# Altium PCB DustCollectorSwitch_V2.PcbDoc
Units mil, origin at the board's own origin, x right, y up, seen from the top; angles counter-clockwise.
Board outline 2100 x 2705.2 mil, 2 copper layers (Top Layer, Bottom Layer); 49 components, 28 nets, 158 pads, 26 vias.
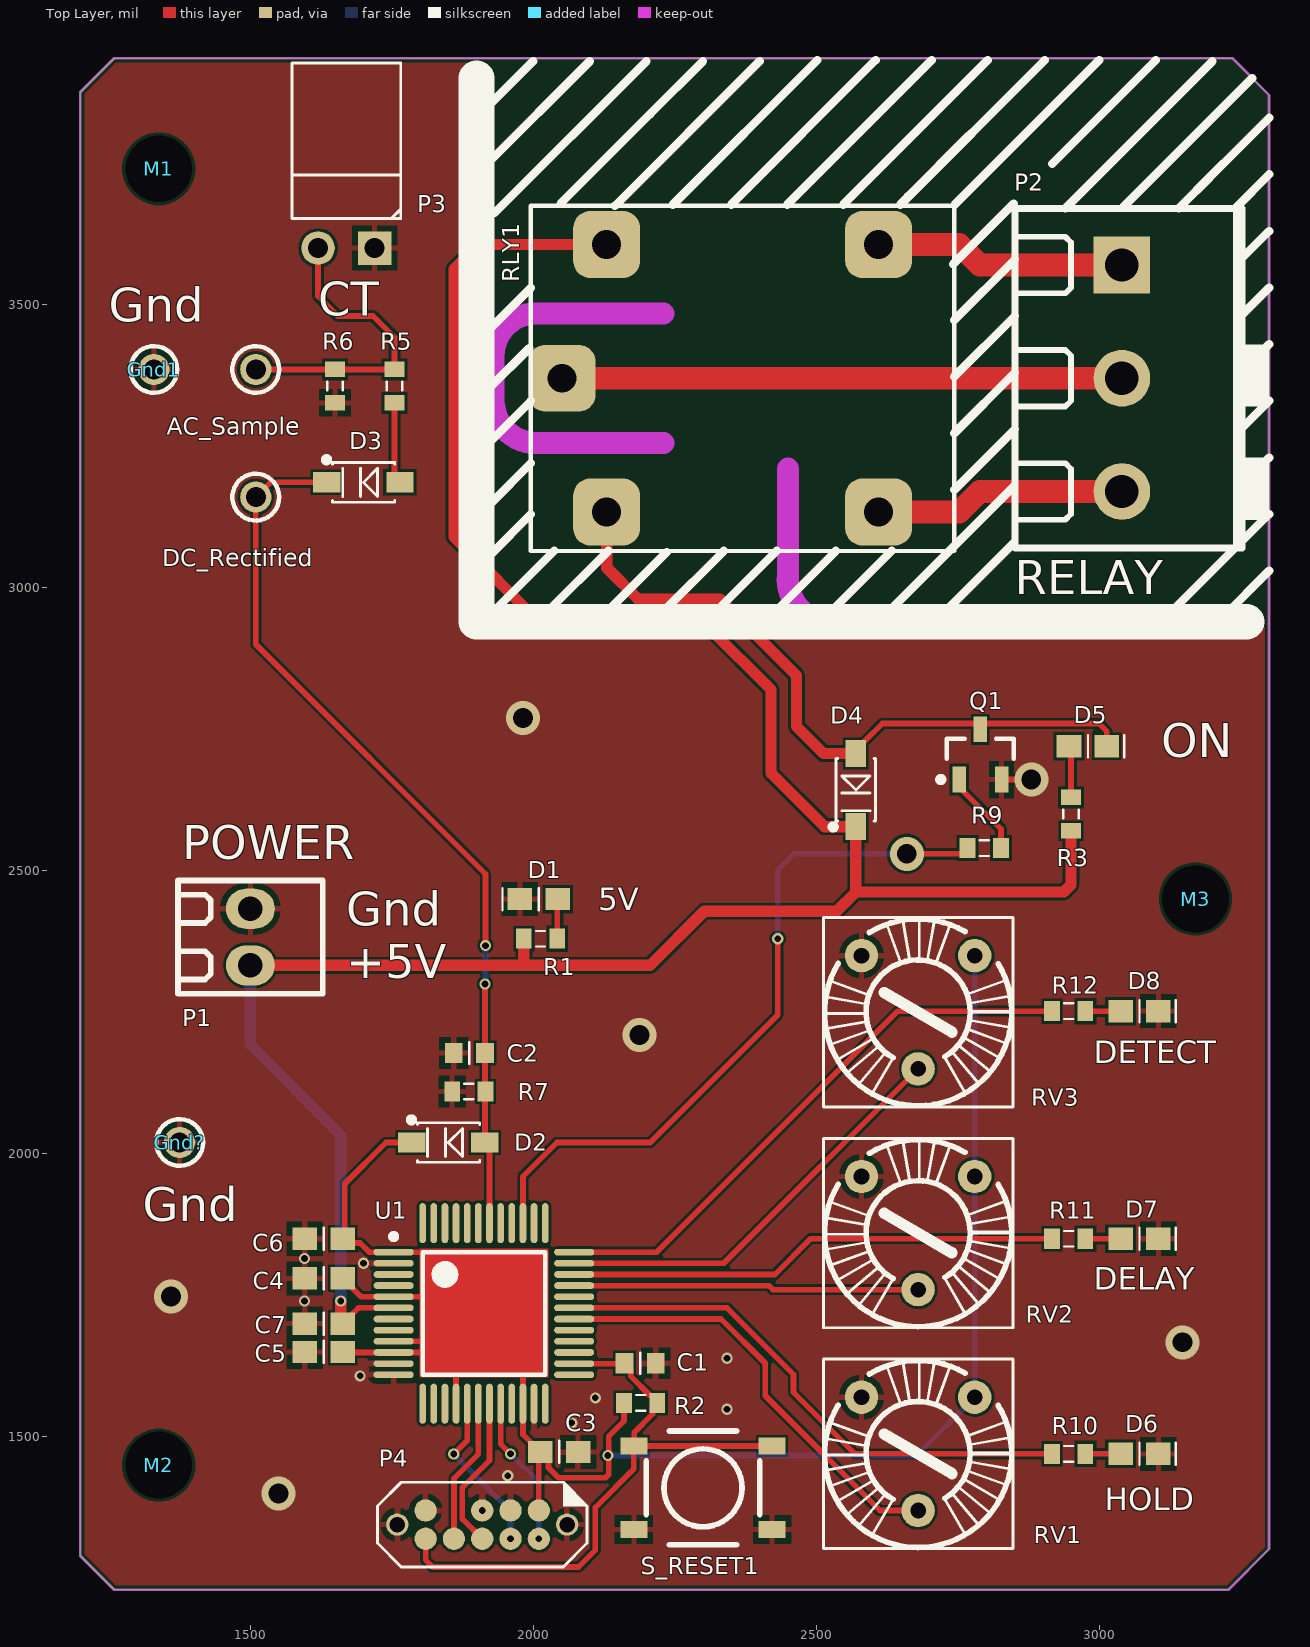
[diagram p0: Top Layer view]
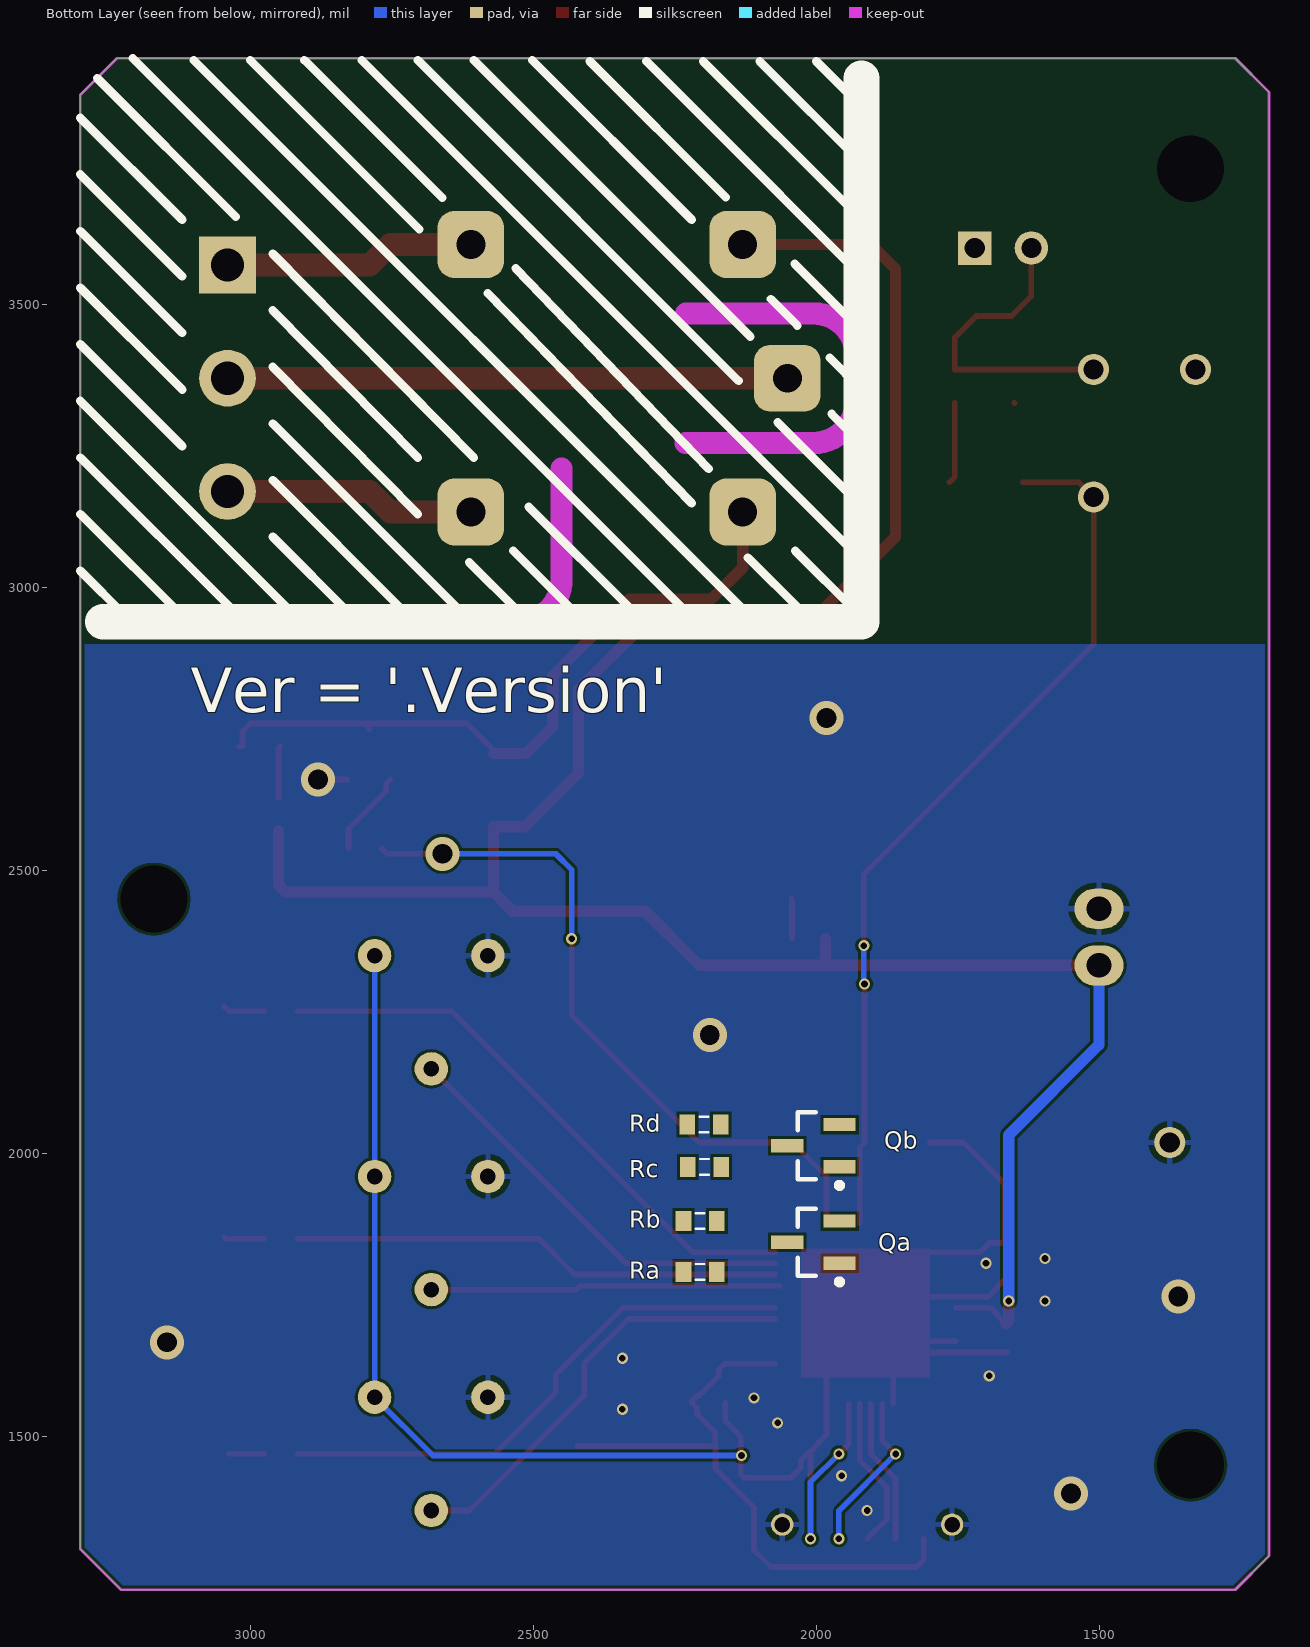
[diagram p1: Bottom Layer view, seen from below]
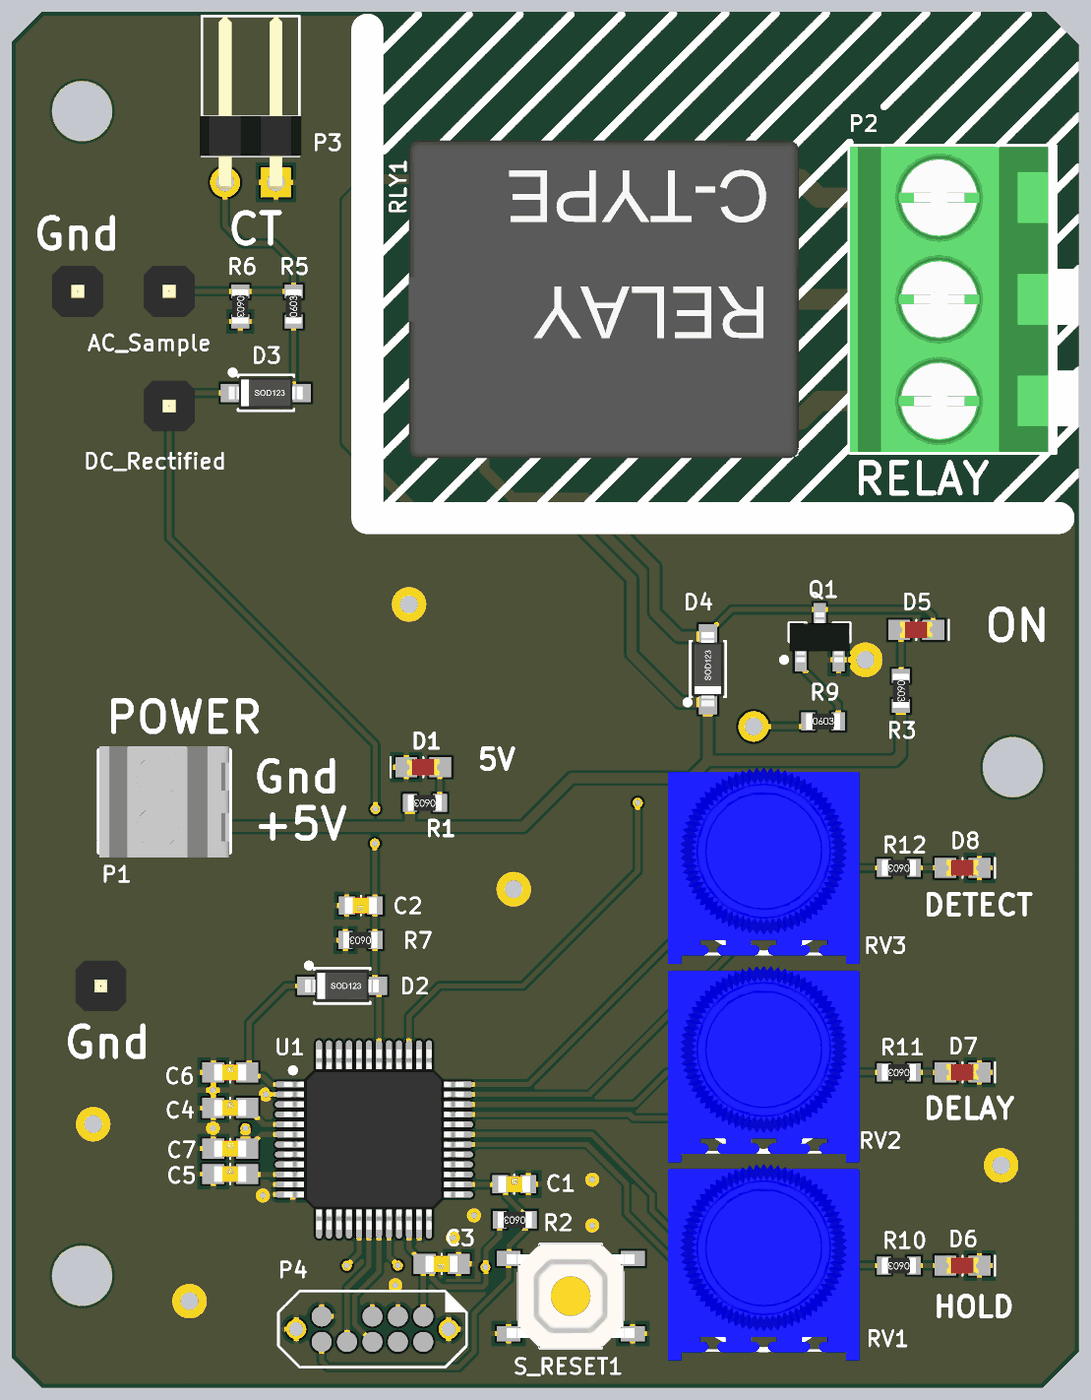
[diagram p2: 3D render of the assembled board from above, using the file's embedded part models]
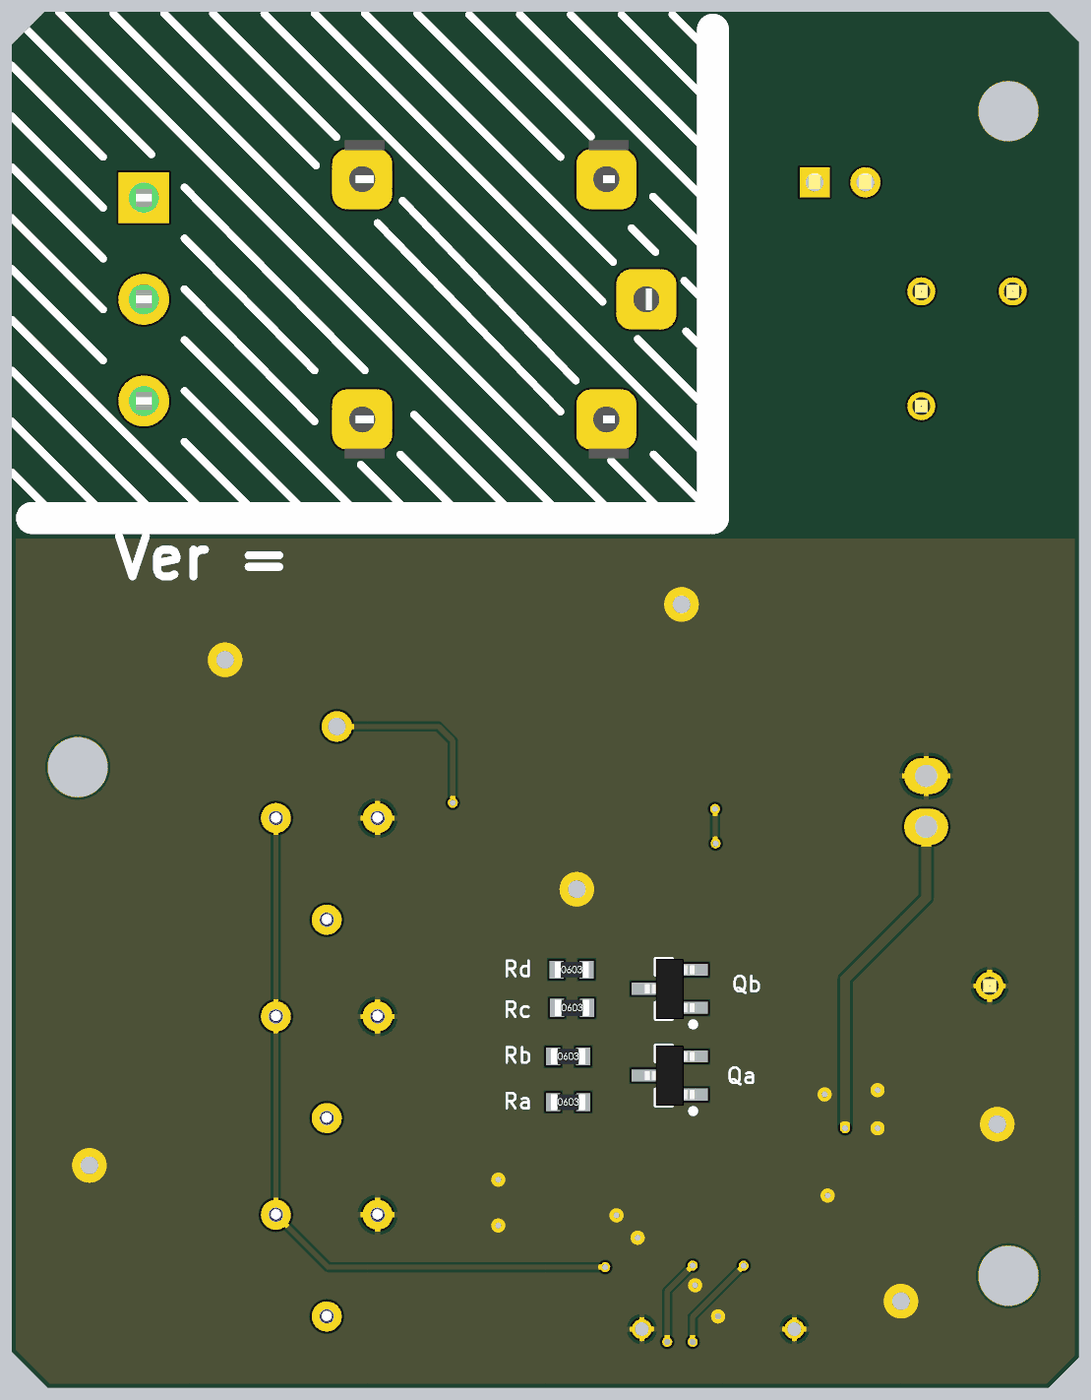
[diagram p3: 3D render of the assembled board from below, using the file's embedded part models]

## Layer stack, top to bottom
Top Solder: solder mask 0.4, Solder Resist, Dk 3.5
Top Layer: signal copper 1.4
Dielectric1: dielectric 12.6, FR-4, Dk 4.8
Bottom Layer: signal copper 1.4
Bottom Solder: solder mask 0.4, Solder Resist, Dk 3.5

## Board outline
1259.84,1230 1200,1289.84 1200,3875.35 1259.84,3935.2 3235.43,3935.2 3300,3870.63 3300,1301.65 3228.35,1230

## Design rules (kind name [scope] priority, off if disabled: settings)
Clearance [All] p1: gap=5 ignorepadtopadclearanceinfootprint=FALSE
HoleSize [All] p1: absolutevalues=TRUE maxlimit=137.8 minlimit=1 maxpercent=80.000 minpercent=20.000
MinimumSolderMaskSliver [All] p1 off: minsoldermaskwidth=10
PolygonConnect PolygonConnect_Via [IsPolygon vs IsVia] p1: connectstyle=Direct reliefconductorwidth=10 reliefentries=4 polygonreliefangle="90 Angle" airgapwidth=10
PolygonConnect [All] p2: connectstyle=Relief reliefconductorwidth=10 reliefentries=4 polygonreliefangle="90 Angle" airgapwidth=10
RoomDefinition DustCollectorSwitch_V2 [InComponentClass('DustCollectorSwitch_V2')] p1: confinementstyle=ConfineIn formatcopy=TRUE lockcomponents=FALSE outline 1000,1099 3500,1099 3500,4165 1000,4165
RoutingVias [All] p1: holewidth=28 width=50 viastyle="Through Hole" minholewidth=28 minwidth=50 maxholewidth=28 maxwidth=50
SilkToSolderMaskClearance SilkscreenOverComponentPads [IsPad] p1 off: minsilkscreentomaskgap=10 clearancetoexposedcopper=TRUE
SolderMaskExpansion [All] p1: expansion=4 istentingtop=FALSE
Width [All] p1: maxlimit=40 minlimit=10 preferedwidth=10
27 further rules are at their usual default settings.

## Components (designator, comment, footprint, x,y, rotation, side; value= is the part's Value field where it differs from the comment)
AC_Sample "Vdd" "PCBPIN - 0.9mm" 1510,3385.55 r0 top
C1 "100nF" CCNP1608-0603_N 2189,1630 r0 top
C2 "100nF" CCNP1608-0603_N 1887.22,2178.01 r180 top
C3 "100nF" CCNP1608-0603 2046,1473.33 r180 top
C4 "100nF" CCNP1608-0603 1630,1780 r0 top
C5 "100nF" CCNP1608-0603 1630,1650 r0 top
C6 "2.2uF" CCNP1608-0603 1630,1850 r0 top
C7 "1uF" CCNP1608-0603 1630,1700 r0 top
D1 "LED Red" LED1608-0603-RED 2010,2450 r0 top
D2 "1N4148W" SOD-123 1850,2020 r0 top
D3 "1N4148W" SOD-123 1700,3186.05 r0 top
D4 "1N4148W" SOD-123 2570,2642.52 r90 top
D5 "LED Red" LED1608-0603-RED 2980,2720 r180 top
D6 "LED Red" LED1608-0603-RED 3071,1470 r180 top
D7 "LED Red" LED1608-0603-RED 3071,1850 r180 top
D8 "LED Red" LED1608-0603-RED 3071,2252 r180 top
DC_Rectified "Vdd" "PCBPIN - 0.9mm" 1510,3160 r0 top
Gnd1 "Gnd" "PCBPIN - 0.9mm" 1330,3385.55 r0 top
Gnd? "Gnd" "PCBPIN - 0.9mm" 1375.53,2020 r0 top
M1 "Mounting hole" "3mm hole" 1338.58,3740 r0 top
M2 "Mounting hole" "3mm hole" 1338.58,1450 r0 top
M3 "Mounting hole" "3mm hole" 3170,2450 r0 top
P1 "Terminal2_2.54mm" TYCO-282834-2 1500.47,2382.8 r270 top
P2 "Terminal3_5.08mm" MOLEX-39544-3003 3040,3570 r180 top
P3 "Header, 2-Pin, Right Angle" HDR1X2H 1720,3600 r180 top
P4 "SWD Connector 2x5-Pin" SWD-2x5-Jig-Pads 2010,1370 r180 top
Q1 "MMBT3904LT1G" SOT23_N 2790,2705.43 r270 top
Qa "DNP" SOT23_M 2005,1843.83 r180 bottom
Qb "DNP" SOT23_M 2005,2014.31 r180 bottom
R1 "1K" CR1608-0603_N 2013.15,2380 r180 top
R2 "1K" CR1608-0603_N 2190,1560 r180 top
R3 "1K" CR1608-0603_N 2950,2600 r270 top
R5 "470 R" CR1608-0603_N 1755,3356.02 r90 top
R6 "470 R" CR1608-0603_N 1650,3356.02 r270 top
R7 "10K" CR1608-0603_N 1886.32,2110 r180 top
R9 "1K" CR1608-0603_N 2796.81,2540 r0 top
R10 "1K" CR1608-0603_N 2946,1470 r180 top
R11 "1K" CR1608-0603_N 2946,1850 r180 top
R12 "1K" CR1608-0603_N 2946,2252 r180 top
Ra "DNP" CR1608-0603_N 2205,1791.4 r180 bottom
Rb "DNP" CR1608-0603_N 2205,1881.23 r180 bottom
Rc "DNP" CR1608-0603_N 2197.28,1976.91 r180 bottom
Rd "DNP" CR1608-0603_N 2198.04,2051.71 r180 bottom
RLY1 "ORWH-SH-105D1F,000" "RELAY - ORWH-SH" 2370,3370 r0 top
RV1 "1K" RV_PCB5 2680,1470 r270 top
RV2 "1K" RV_PCB5 2680,1860 r270 top
RV3 "1K" RV_PCB5 2680,2250 r270 top
S_RESET1 "SMD-SW-4_5.1x5.1x3.5_M" SMD-SW-4_5.1x5.1x3.5_M 2300,1410 r0 top
U1 "MK20DX128VLF5" TSQFP50P900X900-48N 1912.99,1718 r270 top

## Footprints (in the part's own frame and the unit in brackets; to place one, negate y for a bottom-side part, rotate by r counter-clockwise, add the part's x,y. Pads: shape width x height; smd on the part's side, far side on the other; paste and mask are expansions set on the pad)
"3mm hole" [mil]
  round 60 hole 118.11: 0(0,0)
CCNP1608-0603 [mm]
  rect 1.1x1 smd: 1(-0.85,0) 2(0.85,0)
  silkscreen extent 0,-0.5 0,0.5, body extent -0.8,-0.4 0.8,0.4, height 0.3
CCNP1608-0603_N [mm]
  rect 0.8x0.9 smd: 1(-0.7,0) 2(0.7,0)
  silkscreen extent 0,-0.48 0,0.48, body extent -0.8,-0.4 0.8,0.4, height 0.3
CR1608-0603_N [mm]
  rect 0.7x0.9 smd: 1(-0.75,0) 2(0.75,0)
  silkscreen extent -0.2,-0.35 0.2,0.35, body extent -0.85,-0.4 0.85,0.4, height 0.56
HDR1X2H [mm] "Header; 2 Position; Right Angle"
  rect 1.5x1.5 hole 0.9: 1(0,0)
  round 1.5 hole 0.9: 2(2.54,0)
  silkscreen extent -1.17,-8.31 3.71,-1.32, body extent -1.27,-8.3 3.81,0.33, height 2.54
LED1608-0603-RED [mm] "SMT-LED 0603"
  rect 1.1x1 smd: A(0.85,0) K(-0.85,0)
  silkscreen extent -1.62,-0.5 0,0.5, body extent -0.8,-0.4 0.8,0.4, height 0.7
MOLEX-39544-3003 [mm] "Wire-To-Board Terminal Block"
  rect 2.54x2.54 hole 1.5: 1(0,0)
  round 2.54 hole 1.5: 2(0,5.08) 3(0,10.16)
  silkscreen extent -5.4,-2.54 4.83,12.7, body extent -5.08,-2.54 4.83,12.7, height 14.6
"PCBPIN - 0.9mm" [mm]
  round 1.4 hole 0.9: 1(0,0)
  silkscreen extent -1.05,-1.05 1.05,1.05, body extent -1.27,-1.27 1.27,1.27, height 6
"RELAY - ORWH-SH" [mm] "Relay, PCB Mount, ORWH Series"
  rrect50% 3x3 hole 1.3: C1(-6.1,6) C2(-6.1,-6) COM(-8.1,0) NC(6.1,6) NO(6.1,-6)
  silkscreen extent -9.5,-7.75 9.5,7.75, body extent -9.88,-7.95 9.62,7.95, height 15
RV_PCB5 [mm] "Vishay 63M-T607 (F347-292 or similar)"
  round 1.5 hole 0.7: CCW(-2.54,-2.54) CW(-2.54,2.54) W(2.54,0)
  silkscreen extent -4.25,-4.25 4.25,4.25, body extent -5.08,-4.79 4.75,4.79, height 4.42
SMD-SW-4_5.1x5.1x3.5_M [mm] "Miniature SMD PCB Push Button - C318886"
  rect 1.2x0.762 smd: 1(3.1,-1.875) 1b(-3.1,-1.875) 2(3.1,1.875) 2b(-3.1,1.875)
  silkscreen extent -2.55,-2.55 2.55,2.55, body extent -3.2,-2.65 3.2,2.65, height 3.5
SOD-123 [mm] "SOD-123; 2 Leads; Body 2.7 x 1.6 mm, (LxW)"
  rect 1.22x0.91 smd: A(1.64,0) K(-1.64,0)
  silkscreen extent -1.78,-0.89 1.41,1.14, body extent -1.85,-0.77 1.85,0.78, height 1.35
SOT23_M [mm] "SOT23, 3-Leads, Body 2.9x1.3mm, Pitch 0.95mm, Lead Span 2.3mm - IPC Low Density"
  rect 1.45x0.6 smd: 1(1.175,-0.95) 2(1.175,0.95) 3(-1.175,0)
  silkscreen extent -0.7,-1.9 1.29,1.5, body extent -1.25,-1.5 1.25,1.5, height 1.05
SOT23_N [mm] "SOT23, 3-Leads, Body 2.9x1.3mm, Pitch 0.95mm, Lead Span 2.3mm - IPC Medium Density"
  rect 1.15x0.6 smd: 1(1.125,-0.95) 2(1.125,0.95) 3(-1.125,0)
  silkscreen extent -0.7,-1.9 1.25,1.5, body extent -1.25,-1.5 1.25,1.5, height 1.05
SWD-2x5-Jig-Pads [mm] "Connector; SWD; 2x5 Position"
  round 1 hole 0.69: 0(-1.27,0.635) 0(6.35,0.635)
  round 1 smd: 1(0,0) 2(0,1.27) 3(1.27,0) 4(1.27,1.27) 5(2.54,0) 6(2.54,1.27) 8(3.81,1.27) 9(5.08,0) 10(5.08,1.27)
  silkscreen extent -2.16,-1.26 7.24,2.53
TSQFP50P900X900-48N [mm] "Thin QFP, 48-Leads, Body 7x7mm, Pitch 0.5mm, IPC Medium Density"
  oval 0.3x1.8 smd: 1(-2.75,-4.05) 2(-2.25,-4.05) 3(-1.75,-4.05) 4(-1.25,-4.05) 5(-0.75,-4.05) 6(-0.25,-4.05) 7(0.25,-4.05) 8(0.75,-4.05) 9(1.25,-4.05) 10(1.75,-4.05) 11(2.25,-4.05) 12(2.75,-4.05) 25(2.75,4.05) 26(2.25,4.05) 27(1.75,4.05) 28(1.25,4.05) 29(0.75,4.05) 30(0.25,4.05) 31(-0.25,4.05) 32(-0.75,4.05) 33(-1.25,4.05) 34(-1.75,4.05) 35(-2.25,4.05) 36(-2.75,4.05)
  oval 1.8x0.3 smd: 13(4.05,-2.75) 14(4.05,-2.25) 15(4.05,-1.75) 16(4.05,-1.25) 17(4.05,-0.75) 18(4.05,-0.25) 19(4.05,0.25) 20(4.05,0.75) 21(4.05,1.25) 22(4.05,1.75) 23(4.05,2.25) 24(4.05,2.75) 37(-4.05,2.75) 38(-4.05,2.25) 39(-4.05,1.75) 40(-4.05,1.25) 41(-4.05,0.75) 42(-4.05,0.25) 43(-4.05,-0.25) 44(-4.05,-0.75) 45(-4.05,-1.25) 46(-4.05,-1.75) 47(-4.05,-2.25) 48(-4.05,-2.75)
  silkscreen extent -3.57,-4.17 2.75,2.75, body extent -4.5,-4.5 4.5,4.5, height 1.6
TYCO-282834-2 [mm] "Terminal Block (2.54mm)"
  oval 1.8x2.2 hole 1.1: 1(-1.27,0) 2(1.27,0)
  silkscreen extent -2.54,-3.25 2.54,3.25, body extent -2.74,-3.25 2.8,3.25, height 10

## Part data
AC_Sample DC_Rectified Gnd1 Gnd?: library part TP, "Test Point"
C1 C2: library part Cap_CCNP_0603_100nF, "Capacitor non-polar SMT 0603", LCSC=C14663, Manufacturer="Generic Components", Class=Passive, Published=08/06/2000, Publisher="Altium Hobart Technology Centre", SubClass=Capacitor
C3 C4 C5: library part Cap_CCNP_0603, "Capacitor non-polar SMT 0603", LCSC=C14663, Manufacturer="Generic Components", Class=Passive, Published=08/06/2000, Publisher="Altium Hobart Technology Centre", SubClass=Capacitor
C6: library part Cap, "Capacitor", LCSC=C23630, Manufacturer="Generic Components", Class=Passive, Published=08/06/2000, Publisher="Altium Hobart Technology Centre", SubClass=Capacitor
C7: library part Cap, "Capacitor", LCSC=C15849, Manufacturer="Generic Components", Class=Passive, Published=08/06/2000, Publisher="Altium Hobart Technology Centre", SubClass=Capacitor
D1 D5 D6 D7 D8: library part LED-0603-Red, "LED 0603 Red", LCSC=C2286, Manufacturer="Generic Components", Class I=Optoelectronic, Class II=LED, Farnell PN=1581239, Published=8-Jun-2000, Publisher="Altium Limited", Revision="July-2002: Re-released for DXP Platform."
D2 D3 D4: "Diode - Switching 75V 150mA 1.25V @ 150mA 4ns, SOD-123", LCSC=C81598, Class=Discrete, SubClass="Diode - Switching"
M1 M2 M3: library part Mounting_Hole
P1: "TE 282834-2 Terminal Block, 2.54 mm, 2 Ways, 30 AWG, 16 AWG, Screw", Farnell PN=2112482
P2: "MULTICOMP MC24367 TERMINAL BLOCK EUROSTYLE, 3 POSITION, 26-12AWG, 5.08mm"
P3: library part "Header 1x2H", LatestRevisionDate=17-Jul-2002, LatestRevisionNote="Re-released for DXP Platform.", Publisher="Altium Limited"
P4: library part SWD2X5_JIG, Farnell PN=1865285, LatestRevisionDate=17-Jul-2002, LatestRevisionNote="Re-released for DXP Platform.", Publisher="Altium Limited"
Q1: "General Purpose Transistor, NPN Silicon, 3-Pin SOT-23, Pb-Free, Tape and Reel", LCSC=C20526, Manufacturer="On Semiconductor", ComponentLink1Description="Manufacturer URL", ComponentLink1URL=http://www.onsemi.com/, ComponentLink2Description=Datasheet, ComponentLink2URL=http://www.onsemi.cn/pub_link/Collateral/MMBT3904LT1-D.PDF, ComponentLink3Description="Package Specification", ComponentLink3URL=http://www.onsemi.cn/pub_link/Collateral/318-08.PDF, DatasheetVersion="Rev. 12", fT Min (MHz)=300, IC Continuous (A)=0.2, Mounting Technology="Surface Mount", PackageDescription="3-Pin Small Outline Transistor, Body 2.92 x 1.3 mm, Pitch 0.95 mm", PackageReference=SOT-23-3-318-08, PackageVersion="Rev. AP, 11/2009", Packing="Tape and Reel", PartNumber=MMBT3904LT1G, Polarity=NPN, RoHS=TRUE
Qa Qb: library part MMBT3904LT1G, "SOT23", ComponentLink1Description="Manufacturer URL", ComponentLink1URL=http://www.onsemi.com/, ComponentLink2Description=Datasheet, ComponentLink2URL=http://www.onsemi.cn/pub_link/Collateral/MMBT3904LT1-D.PDF, ComponentLink3Description="Package Specification", ComponentLink3URL=http://www.onsemi.cn/pub_link/Collateral/318-08.PDF
R1 R2 R3 R9 R10 R11 R12: library part Res_CR0603, "Resistor SMT 0603", LCSC=C21190, Manufacturer="Generic Components", Class=Passive, Published=08/06/2000, Publisher="Altium Hobart Technology Centre", SubClass=Resistor
R5 R6 R7: library part Res_CR0603, "Resistor SMT 0603", LCSC=C23179, Manufacturer="Generic Components", Class=Passive, Published=08/06/2000, Publisher="Altium Hobart Technology Centre", SubClass=Resistor
Ra Rb Rc Rd: library part Res_CR0603, "Resistor SMT 0603", Manufacturer="Generic Components", Class=Passive, Published=08/06/2000, Publisher="Altium Hobart Technology Centre", SubClass=Resistor
RLY1: library part "Relay - ORWH-SH-105D1F", "Relay, ORWH Series, Power, Non Latching, SPDT, 5 VDC, 10 A", Farnell PN=1181034
RV1 RV2 RV3: library part POT_BOURNS_3362P, "Trim Pot - single turn horizontal", Farnell PN="9354298 or similar"
S_RESET1: library part SW_PB-TS, "Tactile Switch SPST 5.10mm X 5.10mm / (1.5mm=C318884) / (2.0mm=C318888) / (3.5mm=C318886)", LCSC=C318886, Revision=1.0
U1: "Micro Kinetis K20: 50MHz Cortex-M4 Performance MCU, 160KB Flash, 16KB SRAM, Full-Speed USB, 48-LQFP", Digikey=MK20DX128VLF50-ND, Farnell PN=2133571, Mouser=841-MK20DX128VLF5

## Via types
v1: diameter 19.68, hole 11.81, Top Layer to Bottom Layer, 19 vias
v2: diameter 60, hole 35, Top Layer to Bottom Layer, 7 vias

## Nets (pads, with @x,y where several pads share a name; then routed paths per layer and width w, separated by ;. In a path a pad name is that pad's centre, name@x,y a point inside that pad or via, vN(x,y) a via of type N, cw(c..) or ccw(c..) an arc to the next point about the centre after c; other vN are vias at no path point)
3V3: C3.2 C4.2 C5.2 C6.2 D2.K P4.1 R2.2 RV1.CW RV2.CW RV3.CW U1.1 U1.5 U1.9 U1.10 U1.16 U1.22 | length 2996.2
  Top Layer w10: C5.2 1664.36,1649.1 1824.41,1649.1 ; C4.2 1665.43,1780 1680.12,1765.31 1680.12,1763.35 1695.94,1747.53 U1.5 1835.53,1747.53 1836,1748 ; C6.2 C6.2@1667.2,1846.27 ; U1.9 1835.53,1668.79 ; D2.K@1799.21,2020 1740,2020 1667.2,1947.2 C6.2@1667.2,1846.27 ; 1835.53,1808.47 1822.52,1808.47 1804.73,1826.27 U1.1 1710.37,1826.27 1694.26,1842.38 1671.09,1842.38 C6.2@1667.2,1846.27 ; 1863.15,1629.42 1863.78,1628.79 U1.16 ; 1972,1635 1981.89,1625.11 U1.22 1981.89,1503.97 1995.88,1489.98 1995.88,1488.01 2010.57,1473.33 C3.2 ; P4.1 2010,1470.79 C3.2 ; R2.2 2160.47,1527.88 2133.21,1500.62 2133.21,1433.61 2127.35,1427.76 2044.88,1427.76 2027.2,1445.44 2027.2,1458.66 C3.2
  Bottom Layer w10: v1(2132,1467) 2677,1467 RV1.CW RV2.CW RV3.CW
5V: C7.2 D4.K P1.2 R1.2 R3.2 RLY1.C1 U1.6 | length 4337.4
  Top Layer w10: C7.2@1665.43,1700 1680.12,1714.69 1680.12,1716.65 1691.31,1727.84 U1.6
  Top Layer w20: P1.2 1983.42,2332.8 ; v1(1660,1740) 1660,1705.43 1664.45,1700.98 C7.2@1665.43,1700 ; R1.2 1983.62,2333.01 1983.42,2332.8 ; RLY1.C1 1903.5,3606.22 1860,3562.72 1860,3090 2020,2930 2310,2930 2420,2820 2420,2672.52 2514.57,2577.95 D4.K 2570,2462.52 ; R3.2 2950,2475.29 2937.23,2462.52 2570,2462.52 ; 1983.42,2332.8 2206.36,2332.8 2302.14,2428.59 2536.07,2428.59 2570,2462.52
  Bottom Layer w20: P1.2 1500.47,2192.8 1660,2033.27 v1(1660,1740)
AC_Sample: AC_Sample.1 P3.2 R5.2 R6.1 | length 551.8
  Top Layer w10: AC_Sample.1 R6.1 R5.2 1755,3442.2 1717.2,3480 1655,3480 1620,3515 P3.2
COM: P2.2 RLY1.COM | length 988.9
  Top Layer w40: RLY1.COM P2.2
CurrentSample: C2.1 D2.A D3.K DC_Rectified.1 R7.1 U1.42 | length 1590.8
  Top Layer w10: D3.K 1536.05,3186.05 DC_Rectified.1 1510,2900 1915.85,2494.15 v1(1915.85,2367.8) ; v1(1914.78,2300) C2.1 1914.78,2020.22 D2.A 1922.84,2011.73 U1.42
  Bottom Layer w10: v1(1914.78,2300) 1915.85,2301.06 v1(1915.85,2367.8)
DelayControl: RV2.W U1.33 | length 618.5
  Top Layer w10: U1.33@2064.47,1767.21 2416.13,1767.21 2423.35,1760 RV2.W
DelayLed: R11.2 U1.34 | length 870.2
  Top Layer w10: U1.34 2426.9,1786.9 2490,1850 R11.2
DetectLed: R12.2 U1.36 | length 1020.4
  Top Layer w10: U1.36 2218.31,1826.27 2644.05,2252 R12.2
GND: C1.2 C2.2 C3.1 C4.1 C5.1 C6.1 C7.1 D1.K D6.K D7.K D8.K Gnd1.1 Gnd?.1 P1.1 P3.1 P4.0 P4.3 P4.5 P4.9 Q1.2 R6.2 R7.2 RV1.CCW RV2.CCW RV3.CCW S_RESET1.1 S_RESET1.1b U1.2 U1.11 U1.12 U1.23 | length 53.3
  Top Layer w10: R6.2@1649.53,3326.02 R6.2 ; Q1.2 v2(2880,2661.14)
  other v1: 1910,1370 1955.09,1431.32 2068.15,1524.77 2342.47,1548.8 2109.83,1568.81 1694.26,1607.75 2342.47,1638.91 1596,1740 1700.16,1806.58 1596,1815
  other v2: 1550,1400 3147,1667 1360.47,1748 2187.95,2210 1981.89,2770
HoldControl: RV1.W U1.30 | length 781.2
  Top Layer w10: U1.30 2331.84,1708.16 2410,1630 2410,1572.72 2612.72,1370 RV1.W
HoldLed: R10.2 U1.31 | length 969.4
  Top Layer w10: U1.31 2342.47,1727.84 2460,1610.31 2460,1578.55 2568.55,1470 R10.2
LevelControl: RV3.W U1.35 | length 749.8
  Top Layer w10: U1.35 2336.58,1806.58 RV3.W
N/C: P2.1 RLY1.NC | length 444.8
  Top Layer w40: RLY1.NC 2752.6,3606.22 2788.82,3570 P2.1
N/O: P2.3 RLY1.NO | length 444.8
  Top Layer w40: RLY1.NO 2752.6,3133.78 2788.82,3170 P2.3
NetD1_A: D1.A R1.1 | length 70.3
  Top Layer w10: R1.1 2042.68,2449.21 D1.A
NetD3_A: D3.A R5.1 | length 144.4
  Top Layer w10: R5.1 1755,3195.62 D3.A
NetD5_A: D5.A R3.1 | length 91.9
  Top Layer w10: D5.A 2950,2716.54 R3.1
NetD6_A: D6.A R10.1 | length 62
  Top Layer w10: R10.1 D6.A
NetD7_A: D7.A R11.1 | length 65.4
  Top Layer w10: R11.1 D7.A ; D7.A@3043.07,1850 D7.A@3045.47,1852.4
NetD8_A: D8.A R12.1 | length 74.6
  Top Layer w10: R12.1 D8.A D8.A@3046.47,2260.94
NetQ1_1: Q1.1 R9.2 | length 151.7
  Top Layer w10: Q1.1 2759.41,2654.33 2759.41,2640.59 2826.34,2573.66 R9.2
RELAY: D4.A D5.K Q1.3 RLY1.C2 | length 1303.3
  Top Layer w10: D4.A 2570,2713.19 2582.91,2726.1 2616.81,2760 2660,2760 2852.28,2760 ; Q1.3 2790,2753.19 2796.81,2760 2852.28,2760 ; D5.K@3020,2720 D5.K 3013.46,2746.06 2999.53,2760 2852.28,2760
  Top Layer w20: RLY1.C2 2129.84,3035.16 2185,2980 2330,2980 2465.16,2844.84 2465.16,2754.84 2512.91,2707.09 D4.A
RELAY_DRV: R9.1 U1.39 | length 1259.3
  Top Layer w10: U1.39 1981.89,1960 2041.89,2020 2206.81,2020 2432.05,2245.24 v1(2432.05,2380) ; v2(2660,2530) 2758.5,2530 2767.28,2538.78 R9.1
  Bottom Layer w10: v1(2432.05,2380) 2432.05,2502.05 2460,2530 v2(2660,2530)
RESETb: C1.1 P4.10 R2.1 S_RESET1.2 S_RESET1.2b U1.26 | length 1080.2
  Top Layer w10: P4.10 1810,1282.52 1822.52,1270 2080,1270 2109.83,1299.83 2109.83,1375.5 2177.95,1443.62 S_RESET1.2b 2178.56,1484.43 2178.56,1507.96 2210.75,1540.15 2210.75,1551.22 R2.1 2219.53,1563.94 2210.75,1572.72 2206.81,1572.72 2172.19,1607.34 2172.19,1619.25 C1.1 2160.86,1629.42 U1.26 ; S_RESET1.2b@2187.95,1483.82 S_RESET1.2
SWD_CLK: P4.4 U1.17 | length 290
  Top Layer w10: v1(1859.66,1469.68) 1883.47,1493.49 U1.17
  Bottom Layer w10: v1(1859.66,1469.68) 1960,1369.35 v1(1960,1320)
SWD_DIO: P4.2 U1.20 | length 266.5
  Top Layer w10: U1.20 1942.52,1487.48 v1(1960,1470)
  Bottom Layer w10: v1(1960,1470) 2010,1420 v1(2010,1320)
SWD_Rx: P4.8 U1.18 | length 256.4
  Top Layer w10: P4.8 1860,1426.53 1903.15,1469.68 U1.18
SWD_Tx: P4.6 U1.19 | length 272.9
  Top Layer w10: P4.6 1875,1355 1875,1410.43 1922.84,1458.27 U1.19
pads on no net: M1.0 M2.0 M3.0 Qa.1 Qa.2 Qa.3 Qb.1 Qb.2 Qb.3 Ra.1 Ra.2 Rb.1 Rb.2 Rc.1 Rc.2 Rd.1 Rd.2 U1.3 U1.4 U1.7 U1.8 U1.13 U1.14 U1.15 U1.21 U1.24 U1.25 U1.27 U1.28 U1.29 U1.32 U1.37 U1.38 U1.40 U1.41 U1.43 U1.44 U1.45 U1.46 U1.47 U1.48

## Polygon pours and split planes (outlines as drawn)
GND on Top Layer "GND_L01_P001" (solid, remove dead copper, pour order 1): 1910,2930 1910,3940 1200,3940 1200,3910 1200,1230 3300,1230 3300,2930
GND on Bottom Layer "tga" (solid, remove dead copper, pour order 0): 1200,2900 3300,2900 3300,1230 1200,1230

## Keep-outs
Keep-Out Layer:
  lines w5: 1200,1289.84 1200,3875.35 1259.84,3935.2 3235.43,3935.2 3300,3870.63 3300,1301.65 3228.35,1230 2700,1230 1350,1230 1259.84,1230 1200,1289.84
  lines w39.37: 1929.83,3409.33 cw(c2005,3409.33) 2005,3484.5 ; 1930,3409.33 1930,3330.67 ccw(c2005.18,3330.67) 2005.18,3255.5 ; 2005,3484.33 2230.16,3484.33 ; 2005.18,3255.67 2230.34,3255.67 ; 2449.83,3015 ccw(c2525,3015) 2525,2939.83 ; 2450,3015 2450,3210 ; 2525,2940 3080,2940

## Other copper
Top Layer:
  rectangle net 3V3: 1799,1605 2027,1833

## Silkscreen, mask and mechanical layers (free items; w line width, h text height)
Top Overlay:
  rectangle: 3252.6,3120 3300,3230
  rectangle: 3252.6,3320 3300,3430
  lines w15: 1916.5,3746.5 2100,3930 ; 1922.21,3352.21 1992.99,3422.99 ; 1923.14,3853.14 2000,3930 ; 1925.21,3059.22 1995.98,3130 ; 1925.21,3149.22 1995.98,3220 ; 1925.21,3259.22 1995.98,3330 ; 1925.21,3459.22 1995.98,3530 ; 1929.84,2957.72 2037,3064.88 ; 1932.56,3662.56 2200,3930 ; 2025.37,2957.72 2132.54,3064.88 ; 2048.5,3678.5 2206.57,3836.57 2300,3930 ; 2128.84,2955.84 2236,3063 ; 2144.5,3674.5 2400,3930 ; 2229.84,2957.72 2337,3064.88 ; 2246.5,3676.5 2502,3932 ; 2322.84,2957.72 2430,3064.88 ; 2349.5,3676.5 2605,3932 ; 2427.76,2957.72 2534.92,3064.88 ; 2448.5,3676.5 2704,3932 ; 2526.05,2957.72 2633.21,3064.88 ; 2547.5,3676.5 2803,3932 ; 2617.71,2947.71 2850,3180 ; 2648.5,3676.5 2904,3932 ; 2661.89,3691.34 2769.06,3798.5 ; 2727.01,2957.01 2848.46,3078.46 ; 2741.89,3571.34 2849.06,3678.5 ; 2743.86,3172.84 2851.02,3280 ; 2743.86,3272.84 2851.02,3380 ; 2743.86,3372.84 2851.02,3480 ; 2743.86,3472.84 2851.02,3580 ; 2744.5,3676.5 3000,3932 ; 2917.25,3749.25 3100,3932 ; 2940,3670 3200,3930 ; 3041.99,3671.99 3270,3900 ; 3109.12,2939.12 3300,3130 ; 3140,3670 3300,3830 ; 3161.3,3791.3 3220,3850 ; 3171.3,3701.3 3220,3750 ; 3218.25,2948.25 3300,3030 ; 3241.3,3671.3 3300,3730 ; 3251.3,3181.3 3300,3230 ; 3251.3,3281.3 3300,3330 ; 3251.3,3381.3 3300,3430 ; 3251.3,3481.3 3300,3530 ; 3251.3,3581.3 3300,3630
  lines w62.99: 1900,3900 1900,2940 3260,2940
  text "CT" at 1620,3480 h60
  text "RELAY" at 2851.02,2988.75 h60
  text "ON" at 3109.12,2700.32 h60
  text "POWER" at 1380,2520 h60
  text "5V" at 2114.78,2430.32 h40
  text "Gnd" at 1670,2402.8 h60
  text "+5V" at 1670,2310 h60
  text "DETECT" at 2990,2160 h40
  text "DELAY" at 2990,1760 h40
  text "HOLD" at 3010,1370 h40
Bottom Overlay:
  lines w15: 1916.5,3746.5 2100,3930 ; 1918.25,3548.25 2206.57,3836.57 2300,3930 ; 1922.21,3352.21 1976.5,3406.5 ; 1923.14,3853.14 2000,3930 ; 1925.21,3149.22 2067.99,3292.01 ; 1925.21,3259.22 1972.99,3307.01 ; 1925.21,3459.22 2037.99,3572.01 ; 1927.94,3056.94 2803,3932 ; 1929.84,2957.72 2037,3064.88 ; 1932.56,3662.56 2200,3930 ; 2025.37,2957.72 2120.55,3052.89 ; 2033.11,3463.11 2080,3510 ; 2080,2947.71 2115.71,2947.71 3100,3932 ; 2116.5,3443.5 2605,3932 ; 2137.27,3365.27 2704,3932 ; 2160,3690 2400,3930 ; 2190,3210 2530.83,3563.94 ; 2219.92,3149.22 2580,3520 ; 2219.92,3649.92 2502,3932 ; 2229.84,2957.72 3207.06,3934.94 ; 2322.84,2957.72 2508.17,3143.05 ; 2427.76,2957.72 2534.92,3064.88 ; 2526.05,2957.72 2613.02,3044.69 ; 2605,3230 2960,3590 ; 2617.71,2947.71 2960,3290 ; 2661,3689 2904,3932 ; 2701,3633 3000,3932 ; 2704,3130 2960,3390 ; 2704,3230 2960,3490 ; 2727.01,2957.01 2960,3190 ; 2817.5,2947.5 2960,3090 ; 2915,2945 3300,3330 ; 3021.62,2951.62 3300,3230 ; 3025,3655 3270,3900 ; 3109.12,2939.12 3300,3130 ; 3120,3250 3300,3430 ; 3120,3350 3300,3530 ; 3120,3450 3300,3630 ; 3120,3550 3300,3730 ; 3120,3650 3300,3830 ; 3218.25,2948.25 3300,3030
  lines w62.99: 1920,3900 1920,2940 3260,2940
  text "Ver = '.Version'" at 3104.46,2780 h78.74